# EAGLE board breakout-soic8 (EAGLE 6.5.0)
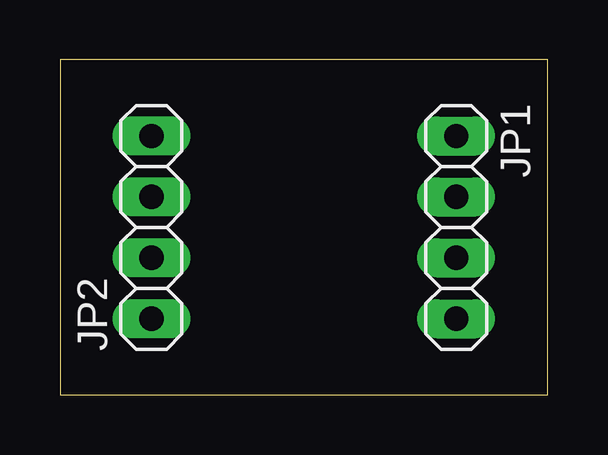
[diagram p0: board, top side]
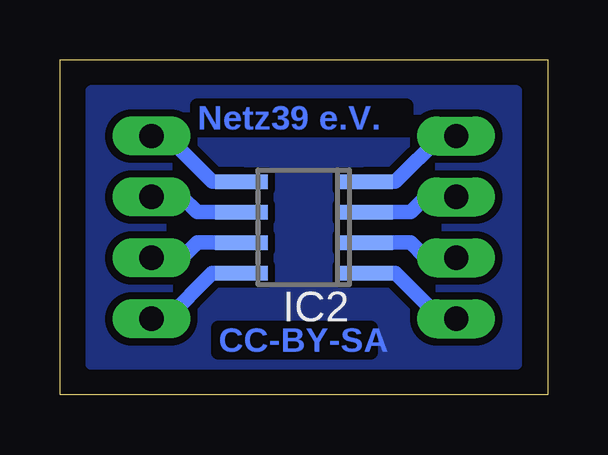
[diagram p1: board, bottom side, seen from below]

Size 20.32 x 13.97 mm. Coordinates in mm from the lower left corner, seen from the top.
Outline: 0,0 20.32,0 20.32,13.97 0,13.97 0,0
Copper layers (1*16): Top 0.035mm / dielectric 1.5mm / Bottom 0.035mm
Design rules "default *": minimum track width 12mil, minimum drill 24mil, track to track 12mil, track to pad 12mil, pad to pad 12mil, via to via 12mil, smd to smd 8mil, copper to edge 40mil, drill to drill 8mil, minimum pad ring 12mil, minimum via ring 12mil, stop-mask expansion 4mil, vias tented up to drill 0mil, thermal gap 10mil
bRestrict: area 4.4,6.3 to 5.7,7.6; area 14.6,6.3 to 15.9,7.6

## Footprints (pad centres in the part's own frame; a part is rotated, then mirrored left to right if it is on the bottom)
SO08 = smd 0.6 x 2.2: 1 -1.905,-2.6; 2 -0.635,-2.6; 3 0.635,-2.6; 4 1.905,-2.6; 5 1.905,2.6; 6 0.635,2.6; 7 -0.635,2.6; 8 -1.905,2.6
1X04 = drill 1.016 long: 1 -3.81,0; 2 -1.27,0; 3 1.27,0; 4 3.81,0

## Placement (x,y rotation side)
IC2  NE555D  [SO08]  10.16,6.99 90 bottom
JP1  [1X04]  16.51,6.99 270 top
JP2  [1X04]  3.81,6.99 90 top

## Library data of the parts
IC2 = linear
JP1 JP2 = pinhead

## Nets
N$1: IC2.1 JP2.1
N$2: IC2.2 JP2.2
N$3: IC2.3 JP2.3
N$4: IC2.4 JP2.4
N$5: IC2.5 JP1.1
N$6: IC2.6 JP1.2
N$7: IC2.7 JP1.3
N$8: IC2.8 JP1.4

## Tracks (layer width: path | path; a pad name or v marks a point on that pad's centre or on a via)
N$1
  Bottom 0.61: IC2.1 6.35,5.08 4.45,3.17 JP2.1
N$2
  Bottom 0.61: IC2.2 5.71,6.35 5.08,5.71 JP2.2
N$3
  Bottom 0.61: IC2.3 5.71,7.62 5.08,8.26 JP2.3
N$4
  Bottom 0.61: IC2.4 6.35,8.89 4.45,10.79 JP2.4
N$5
  Bottom 0.61: IC2.5 13.97,8.89 15.88,10.79 JP1.1
N$6
  Bottom 0.61: IC2.6 14.61,7.62 15.24,8.26 JP1.2
N$7
  Bottom 0.61: IC2.7 14.61,6.35 15.24,5.71 JP1.3
N$8
  Bottom 0.61: IC2.8 13.97,5.08 15.88,3.17 JP1.4
N$9
  pour Bottom: 1.27,12.7 19.05,12.7 19.05,1.27 1.27,1.27

## Text on the board
Bottom: Netz39 e.V. | CC-BY-SA